# Altium PCB eth_witch.PcbDoc (part 2 of 2)
Units mm, origin at the board's own origin, x right, y up, seen from the top; angles counter-clockwise.
Board outline 80 x 66.5 mm, 4 copper layers (Top Layer, Layer 2, Layer 1, Bottom Layer), stack 1.01 mm thick; 112 components, 94 nets, 442 pads, 468 vias.
Unrouted connection lines stored in the file: 2.
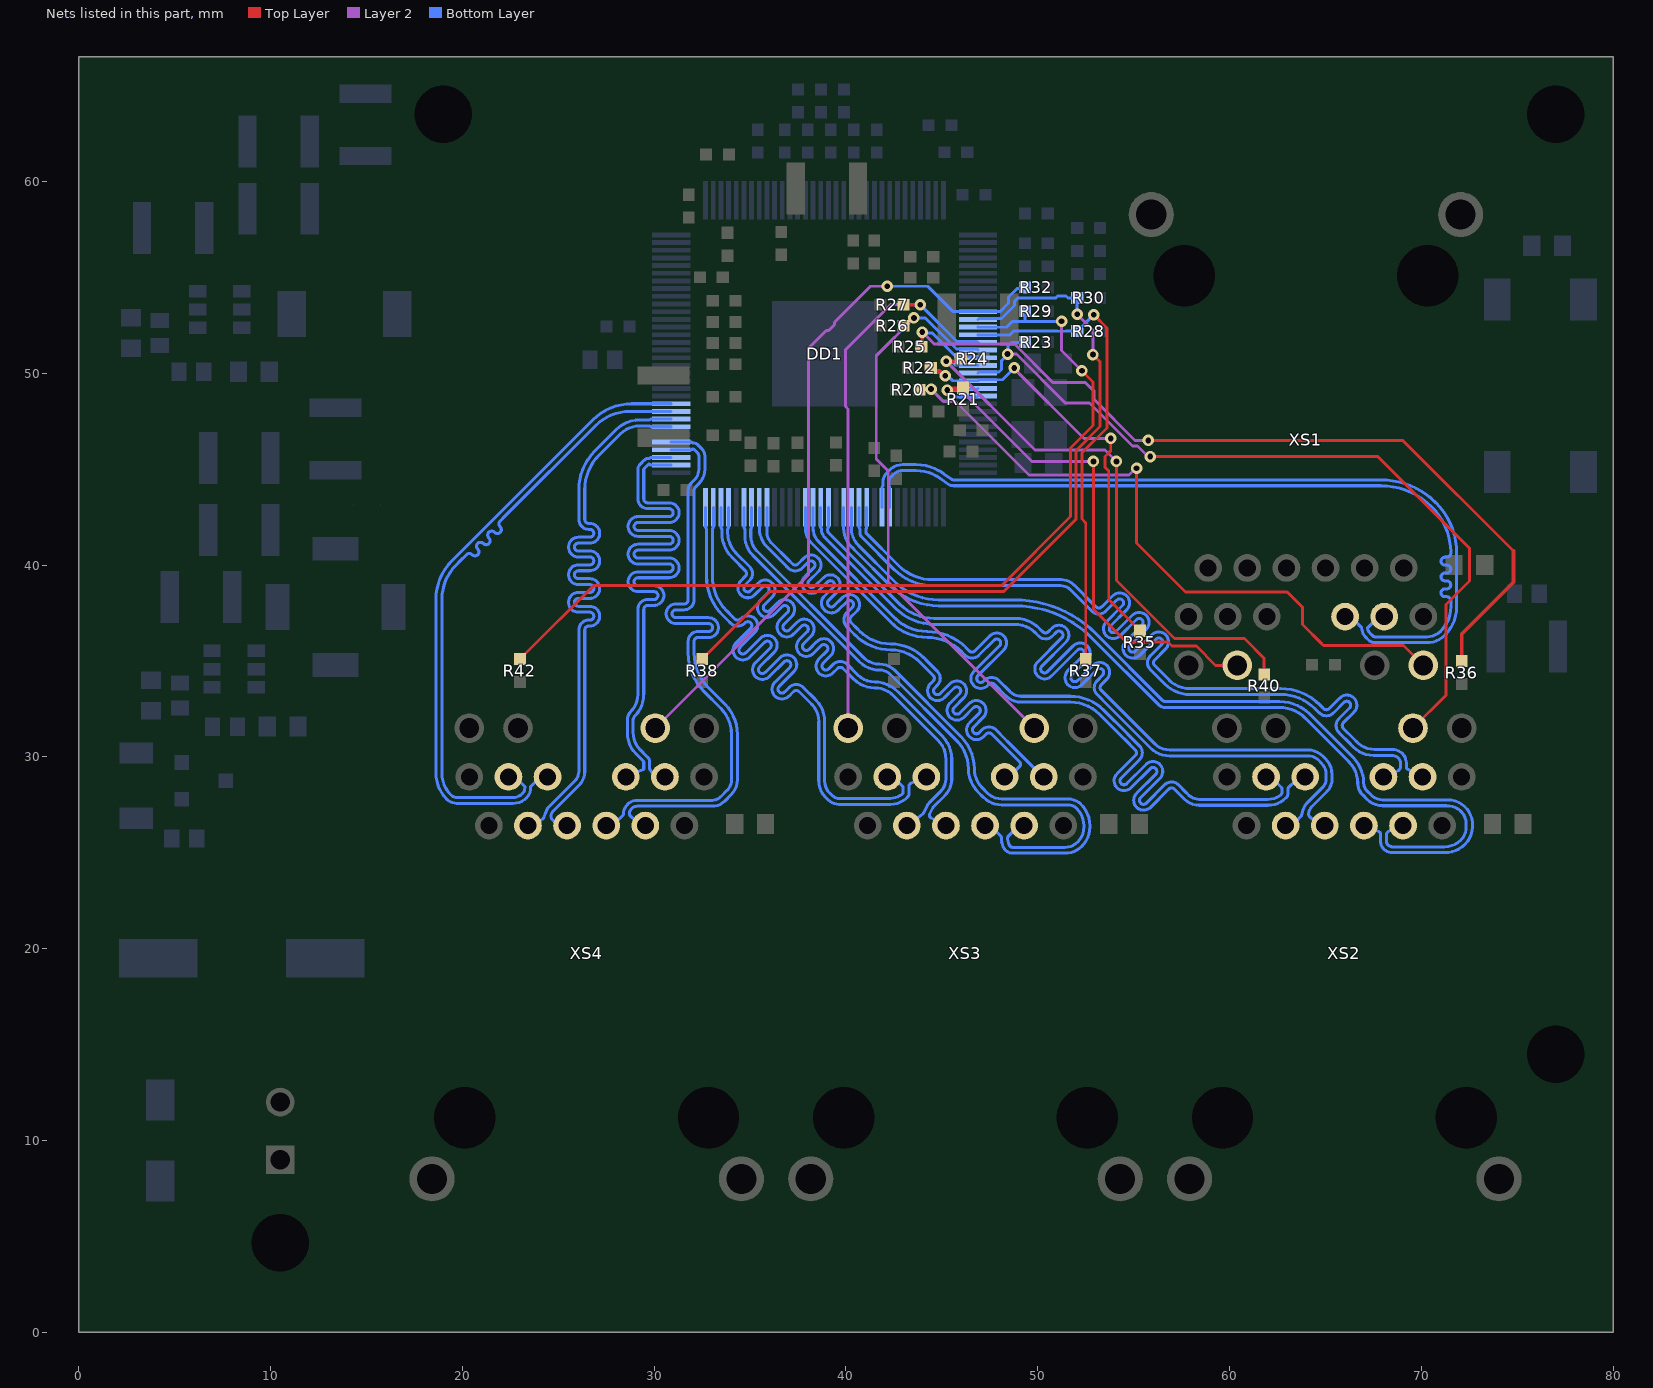
[diagram p4: the nets of this part, all layers, seen from the top]

## Via types
v1: diameter 0.6, hole 0.3, Top Layer to Bottom Layer, tented both sides, 450 vias
v2: diameter 0.8, hole 0.4, Top Layer to Bottom Layer, tented both sides, 18 vias

## Nets (pads, with @x,y where several pads share a name; then routed paths per layer and width w, separated by ;. In a path a pad name is that pad's centre, name@x,y a point inside that pad or via, vN(x,y) a via of type N, cw(c..) or ccw(c..) an arc to the next point about the centre after c; other vN are vias at no path point) (continued)
P0D_N: DD1.105 XS1.9 | length 44.5
  Bottom Layer w0.158: DD1.105@41.88,43.01 41.88,44.024 cw(c42.037,44.024) 41.926,44.135 41.926,44.309 cw(c42.656,44.309) 42.139,44.825 42.257,44.943 cw(c42.958,44.242) 42.958,45.233 43.651,45.233 43.652,45.233 cw(c43.642,42.74) 45.086,44.772 45.088,44.77 45.509,44.472 ccw(c45.6,44.601) 45.6,44.443 45.699,44.443 67.88,44.443 67.882,44.443 cw(c67.882,40.392) 70.747,43.256 ; XS1.9@66.02,37.31 cw(c66.02,36.607) 66.517,37.104 66.886,36.735 ccw(c67.59,36.735) 67.092,36.237 67.237,36.092 ccw(c67.576,36.431) 67.576,35.952 70.281,35.952 ccw(c70.281,37.284) 71.223,36.342 ccw(c69.738,37.827) 71.838,37.827 71.838,40.621 71.838,40.625 ccw(c68.113,40.622) 70.748,43.256
P0D_P: DD1.104 XS1.8 | length 44.5
  Bottom Layer w0.158: DD1.104@42.28,43.01 42.28,44.024 ccw(c42.123,44.024) 42.234,44.135 42.234,44.309 cw(c42.656,44.309) 42.357,44.607 42.475,44.725 cw(c42.958,44.242) 42.958,44.925 43.655,44.925 43.657,44.925 cw(c43.636,42.725) 44.908,44.52 44.91,44.519 45.33,44.221 ccw(c45.6,44.601) 45.6,44.135 45.699,44.135 67.88,44.135 67.882,44.135 cw(c67.882,40.392) 70.528,43.04 cw(c68.113,40.622) 71.496,41.106 cw(c68.113,40.622) 71.506,41.027 71.53,40.625 71.53,40.615 cw(c71.324,40.615) 71.324,40.409 71.228,40.409 ccw(c71.228,40.203) 71.022,40.203 ccw(c71.228,40.203) 71.228,39.997 71.324,39.997 cw(c71.324,39.791) 71.53,39.791 cw(c71.324,39.791) 71.324,39.585 71.229,39.585 ccw(c71.229,39.379) 71.023,39.379 ccw(c71.229,39.379) 71.229,39.173 71.324,39.173 cw(c71.324,38.967) 71.53,38.967 cw(c71.324,38.967) 71.324,38.761 71.229,38.761 ccw(c71.229,38.555) 71.023,38.555 ccw(c71.229,38.555) 71.229,38.349 71.324,38.349 cw(c71.324,38.143) 71.53,38.143 71.53,37.906 71.53,37.827 cw(c69.738,37.827) 71.005,36.56 cw(c70.281,37.284) 70.281,36.26 67.576,36.26 cw(c67.576,36.431) 67.455,36.31 67.31,36.455 cw(c67.59,36.735) 67.194,36.735 67.563,37.104 cw(c68.06,36.607) XS1.8@68.06,37.31
P0LED0: DD1.86 R20.1 XS1.13 | length 38.3
  Top Layer w0.15: v1(55.15,45.05) 55.15,41.15 57.7,38.6 63,38.6 63.8,37.8 63.8,36.9 64.8,35.9 64.8,35.888 64.888,35.8 69.07,35.8 XS1.13@70.1,34.77
  Top Layer w0.25: R20.1@43.825,49.146 43.938,49.259 43.938,49.241 44.017,49.161 44.419,49.161 v1(44.434,49.176)
  Layer 2 w0.15: v1(44.434,49.176) 45.075,48.535 45.702,48.535 49.541,44.697 54.761,44.697 55.114,45.05 v1(55.15,45.05)
  Bottom Layer w0.15: v1(44.434,49.176) 45.062,48.548 45.45,48.548 45.662,48.76 46.83,48.76 DD1.86@46.88,48.81
P0LED1: DD1.85 R21.1 XS1.15 | length 28.1
  Top Layer w0.15: v1(52.9,45.4) 52.9,37.7 54.614,35.986 56.789,35.986 57,35.775 58.266,35.775 59.271,34.77 XS1.15@60.4,34.77
  Top Layer w0.25: v1(45.284,49.124) 45.346,49.186 46.039,49.186 R21.1@46.1,49.247
  Layer 2 w0.15: v1(45.284,49.124) 45.309,49.1 46,49.1 49.7,45.4 v1(52.9,45.4)
  Bottom Layer w0.15: v1(45.284,49.124) 45.327,49.167 46.837,49.167 DD1.85@46.88,49.21
P0LED2: DD1.84 R22.1 R35.1 | length 22.4
  Top Layer w0.15: v1(53.8,46.6) 53.8,45.958 53.5,45.658 53.5,45.1 53.7,44.9 53.7,38.209 55.325,36.584 R35.1@55.325,36.572
  Top Layer w0.25: R22.1@44.422,50.275 44.434,50.275 44.614,50.095 44.86,50.095 45.08,49.875 v1(45.175,49.875)
  Layer 2 w0.15: v1(48.775,50.275) 48.775,50.233 52.408,46.6 v1(53.8,46.6)
  Bottom Layer w0.15: v1(45.175,49.875) 45.297,49.875 45.562,49.61 DD1.84@46.88,49.61 46.93,49.66 48.16,49.66 v1(48.775,50.275)
P1A_N: DD1.108 XS2.10 | length 46.7
  Bottom Layer w0.158: DD1.108@40.68,43.01 40.68,41.996 ccw(c40.837,41.996) 40.726,41.885 40.726,41.685 ccw(c41.034,41.685) 40.816,41.467 42.522,39.761 ccw(c44.536,41.775) 44.536,38.927 51.194,38.927 cw(c51.194,38.211) 51.699,38.719 52.653,37.765 52.773,37.645 52.817,37.601 ccw(c53.182,37.964) 53.545,37.6 54.122,38.177 ; 54.123,38.178 cw(c54.268,38.032) 54.414,38.178 cw(c54.268,38.032) 54.414,37.886 53.525,36.998 53.525,36.991 ccw(c53.934,36.679) 53.57,36.316 ccw(c53.934,36.679) 54.297,36.316 55.14,37.159 ; 55.141,37.159 cw(c55.287,37.014) 55.432,37.159 cw(c55.287,37.014) 55.432,36.868 54.543,35.979 54.543,35.973 ccw(c54.952,35.661) 54.589,35.298 ccw(c54.952,35.661) 55.316,35.298 56.158,36.141 ; 56.159,36.141 cw(c56.305,35.996) 56.45,36.141 cw(c56.305,35.996) 56.45,35.85 55.873,35.272 ccw(c56.236,34.909) 55.874,34.545 56.237,34.181 56.357,34.062 56.631,33.787 56.633,33.785 ccw(c56.963,34.114) 56.636,33.782 ccw(c57.926,35.086) 57.928,33.252 62.661,33.252 cw(c62.661,30.712) 64.457,32.508 64.505,32.46 64.626,32.339 64.672,32.293 ccw(c65.044,32.663) 65.414,32.292 65.964,32.841 cw(c66.109,32.695) 66.255,32.55 65.706,32.001 ccw(c66.076,31.63) 65.707,31.258 66.282,30.683 66.375,30.59 66.396,30.569 66.404,30.561 66.417,30.548 cw(c66.305,30.437) 66.419,30.546 66.436,30.528 ccw(c67.491,31.537) 67.495,30.077 68.462,30.077 cw(c68.462,29.592) 68.805,29.935 cw(c68.564,29.694) 68.905,29.694 68.905,29.463 cw(c68.747,29.463) 68.859,29.351 68.785,29.277 XS2.10@68.02,28.96
P1A_P: DD1.107 XS2.11 | length 46.7
  Bottom Layer w0.158: DD1.107@41.08,43.01 41.08,41.996 cw(c40.923,41.996) 41.034,41.885 41.034,41.685 42.74,39.979 ccw(c44.536,41.775) 44.536,39.235 51.225,39.235 51.227,39.235 cw(c51.226,38.287) 51.896,38.957 51.898,38.956 52.871,37.983 52.991,37.863 53.036,37.818 ccw(c53.182,37.964) 53.327,37.818 53.95,38.441 53.956,38.441 cw(c54.268,38.032) 54.632,38.395 cw(c54.268,38.032) 54.632,37.669 53.789,36.826 ; 53.788,36.825 ccw(c53.934,36.679) 53.788,36.534 ccw(c53.934,36.679) 54.079,36.534 54.968,37.422 54.975,37.422 cw(c55.287,37.014) 55.65,37.377 cw(c55.287,37.014) 55.65,36.65 54.807,35.807 ccw(c54.952,35.661) 54.806,35.515 ccw(c54.952,35.661) 55.098,35.515 55.986,36.404 55.993,36.404 cw(c56.305,35.996) 56.668,36.359 cw(c56.305,35.996) 56.668,35.632 56.091,35.054 ccw(c56.236,34.909) 56.091,34.763 56.455,34.399 56.574,34.279 56.849,34.005 56.851,34.003 ccw(c56.963,34.114) 56.852,34.002 ccw(c57.926,35.086) 57.928,33.56 62.661,33.56 cw(c62.661,30.677) 64.699,32.716 64.73,32.686 64.851,32.564 64.898,32.517 ccw(c65.044,32.663) 65.189,32.517 65.738,33.065 ; 65.738,33.066 cw(c66.109,32.695) 66.426,33.113 66.433,33.113 66.479,33.066 ; 66.48,33.066 66.526,33.019 66.526,33.013 cw(c66.109,32.695) 66.48,32.325 65.931,31.776 ccw(c66.076,31.63) 65.931,31.484 66.507,30.908 66.629,30.786 66.693,30.722 ccw(c67.55,31.644) 66.702,30.714 ccw(c67.55,31.644) 67.553,30.385 68.462,30.385 cw(c68.462,29.592) 69.023,30.153 cw(c68.564,29.694) 69.213,29.694 69.213,29.48 ccw(c69.371,29.48) 69.259,29.369 XS2.11@70.06,28.96
P1B_N: DD1.110 XS2.5 | length 46.7
  Bottom Layer w0.158: DD1.110@39.88,43.01 39.88,41.931 ccw(c41.284,41.931) 40.291,40.939 40.302,40.932 cw(c40.226,40.794) 40.343,40.9 ; 40.344,40.899 40.425,40.806 ccw(c40.776,41.112) 40.446,40.784 42.307,38.922 ccw(c44.832,41.449) 44.832,37.877 48.786,37.877 cw(c48.786,32.198) 52.8,36.215 56.302,32.713 ccw(c56.631,33.043) 56.631,32.577 62.605,32.577 cw(c62.605,30.687) 63.942,32.023 66.22,29.745 cw(c65.111,28.635) 66.68,28.635 ccw(c67.55,28.635) 66.935,28.02 67.162,27.792 ccw(c67.984,28.614) 67.984,27.452 71.316,27.452 cw(c71.318,26.333) 71.906,27.285 cw(c71.318,26.333) 71.908,27.283 cw(c71.437,26.525) 72.33,26.526 72.33,26.524 72.33,26.324 cw(c71.391,26.324) 72.055,25.66 cw(c71.21,26.505) 71.21,25.31 68.496,25.31 cw(c68.496,25.651) 68.255,25.41 cw(c68.436,25.591) 68.18,25.591 68.18,25.958 cw(c68.338,25.958) 68.278,26.104 XS2.5@69.04,26.42
P1B_P: DD1.109 XS2.4 | length 47.6
  Bottom Layer w0.158: DD1.109@40.28,43.01 40.28,41.931 ccw(c41.598,41.931) 40.548,41.134 40.575,41.102 ; 40.576,41.101 40.657,41.008 ccw(c40.776,41.112) 40.664,41.001 42.525,39.14 ccw(c44.832,41.449) 44.832,38.185 48.786,38.185 cw(c48.786,32.199) 53.018,36.433 56.519,32.931 ccw(c56.631,33.043) 56.631,32.885 62.605,32.885 cw(c62.605,30.687) 64.159,32.241 66.438,29.962 cw(c65.111,28.635) 66.988,28.635 ccw(c67.55,28.635) 67.153,28.237 67.38,28.01 ccw(c67.984,28.614) 67.984,27.76 71.374,27.76 cw(c71.374,26.476) 72.655,26.382 72.652,26.334 ccw(c72.809,26.322) 72.652,26.327 cw(c71.358,26.357) 72.651,26.326 cw(c71.358,26.357) 72.273,25.442 cw(c71.21,26.505) 71.21,25.002 68.496,25.002 cw(c68.496,25.651) 68.037,25.192 cw(c68.436,25.591) 67.872,25.591 67.872,25.953 ccw(c67.714,25.953) 67.774,26.099 XS2.4@67,26.42
P1C_N: DD1.113 XS2.2 | length 45.5
  Bottom Layer w0.158: DD1.113@38.68,43.01 38.68,41.996 ccw(c38.837,41.996) 38.726,41.885 38.726,41.86 ccw(c39.345,41.86) 38.907,41.422 42.584,37.746 ccw(c44.597,39.76) 44.597,36.912 48.781,36.912 48.808,36.912 cw(c48.812,35.424) 49.868,36.472 49.87,36.47 49.872,36.468 49.913,36.427 49.932,36.408 50.036,36.304 ccw(c50.401,36.666) 50.764,36.303 50.959,36.498 cw(c51.104,36.352) 51.251,36.207 49.99,34.947 ccw(c50.354,34.583) 49.99,34.22 ; 49.991,34.219 ccw(c50.354,34.583) 50.717,34.22 ; 50.718,34.221 52.067,35.57 cw(c52.213,35.424) 52.359,35.57 cw(c52.213,35.424) 52.359,35.279 51.567,34.487 ccw(c51.931,34.124) 51.567,33.761 ; 51.568,33.759 ccw(c51.931,34.124) 52.294,33.76 ; 52.295,33.761 53.086,34.552 cw(c53.231,34.406) 53.377,34.261 53.092,33.975 ccw(c53.455,33.612) 53.093,33.247 ; 53.093,33.247 53.66,32.68 55.88,30.46 ccw(c56.865,31.445) 56.865,30.052 64.071,30.052 cw(c64.071,29.226) 64.655,29.81 64.783,29.682 cw(c64.185,29.085) 65.03,29.085 65.03,28.832 cw(c64.433,28.832) 64.855,28.41 64.021,27.576 ccw(c64.133,27.464) 64.013,27.567 63.997,27.549 ccw(c64.623,27.01) 63.828,27.232 63.751,26.96 cw(c63.599,27.003) 63.71,26.89 63.467,26.647 cw(c62.92,27.193) XS2.2@62.92,26.42
P1C_P: DD1.112 XS2.3 | length 45.5
  Bottom Layer w0.158: DD1.112@39.08,43.01 39.08,41.996 cw(c38.923,41.996) 39.034,41.885 39.034,41.86 ccw(c39.345,41.86) 39.125,41.64 42.801,37.964 ccw(c44.597,39.76) 44.597,37.22 48.781,37.22 48.847,37.22 cw(c48.847,35.507) 50.058,36.718 50.06,36.716 50.09,36.685 50.255,36.521 ccw(c50.401,36.666) 50.546,36.521 50.741,36.716 cw(c51.104,36.352) 51.416,36.761 51.423,36.761 51.468,36.716 ; 51.467,35.988 50.208,34.729 ccw(c50.354,34.583) 50.499,34.437 51.85,35.788 cw(c52.213,35.424) 52.576,35.788 cw(c52.213,35.424) 52.576,35.061 ; 51.468,35.989 ccw(c51.104,36.352) 51.513,36.664 51.513,36.67 51.468,36.715 ; 52.576,35.06 51.785,34.269 ccw(c51.931,34.124) 52.076,33.977 52.868,34.769 cw(c53.231,34.406) 53.543,34.815 53.55,34.815 53.594,34.77 ; 53.594,34.042 53.31,33.757 ccw(c53.455,33.612) 53.31,33.466 53.877,32.898 56.098,30.678 ccw(c56.865,31.445) 56.865,30.36 64.071,30.36 cw(c64.071,29.226) 64.873,30.028 65,29.9 cw(c64.185,29.085) 65.338,29.085 65.338,28.832 cw(c64.433,28.832) 65.073,28.192 64.292,27.411 ccw(c64.743,26.96) 64.11,27.041 ccw(c64.267,27.021) 64.155,26.91 64.423,26.642 ccw(c64.96,27.18) XS2.3@64.96,26.42 ; 53.595,34.043 ccw(c53.231,34.406) 53.64,34.718 53.64,34.724 53.595,34.769
P1D_N: DD1.115 XS2.9 | length 45.2
  Bottom Layer w0.158: DD1.115@37.88,43.01 37.88,41.931 ccw(c38.982,41.931) 38.203,41.152 42.342,37.013 42.344,37.011 ccw(c44.236,38.903) 44.238,36.227 cw(c44.236,33.687) 46.032,35.483 46.043,35.472 46.207,35.308 ccw(c46.571,35.67) 46.935,35.307 47.714,36.086 cw(c47.86,35.941) 48.006,35.795 46.659,34.448 ccw(c47.022,34.084) 46.658,33.722 ; 46.659,33.72 ccw(c47.022,34.084) 47.385,33.721 ; 47.386,33.722 47.444,33.78 cw(c47.59,33.634) 47.735,33.78 48.313,33.202 48.33,33.185 ccw(c49.134,33.989) 49.134,32.852 51.69,32.852 51.692,32.852 cw(c51.695,30.695) 53.22,32.22 54.407,31.033 54.527,30.913 55.08,30.36 ; 55.081,30.359 cw(c54.936,30.213) 55.081,30.067 54.129,29.115 ccw(c54.492,28.752) 54.804,28.343 54.811,28.343 55.855,29.387 cw(c56.001,29.242) 56.146,29.387 cw(c56.001,29.242) 56.146,29.096 ; 56.146,29.095 55.147,28.097 ccw(c55.511,27.733) 55.147,27.37 ccw(c55.511,27.733) 55.823,27.325 55.829,27.325 56.826,28.322 cw(c56.972,28.177) 57.118,28.322 57.522,27.918 57.642,27.798 57.65,27.79 ccw(c58.405,28.544) 58.405,27.477 62.006,27.477 ccw(c62.006,28.809) 62.948,27.867 ccw(c62.73,28.085) 63.038,28.085 63.038,28.303 cw(c63.196,28.303) 63.084,28.414 63.411,28.741 cw(c63.94,28.212) XS2.9@63.94,28.96
P1D_P: DD1.114 XS2.8 | length 44.1
  Bottom Layer w0.158: DD1.114@38.28,43.01 38.28,41.931 ccw(c39.296,41.931) 38.578,41.212 42.56,37.23 42.564,37.226 ccw(c44.236,38.903) 44.236,36.535 ; 44.238,36.535 cw(c44.236,33.687) 46.25,35.701 46.261,35.69 46.426,35.525 ccw(c46.571,35.67) 46.717,35.525 47.496,36.304 cw(c47.86,35.941) 48.172,36.349 48.178,36.349 48.223,36.304 48.268,36.259 48.268,36.252 cw(c47.86,35.941) 48.223,35.577 ; 48.223,35.576 46.876,34.23 ccw(c47.022,34.084) 47.167,33.938 47.226,33.997 cw(c47.59,33.634) 47.953,33.997 48.531,33.42 48.548,33.403 ccw(c49.134,33.989) 49.134,33.16 51.689,33.16 51.691,33.16 cw(c51.696,30.697) 53.438,32.437 53.441,32.435 54.625,31.25 54.745,31.131 55.344,30.531 55.344,30.525 cw(c54.936,30.213) 55.299,29.85 54.347,28.897 ccw(c54.492,28.752) 54.346,28.606 54.347,28.606 ccw(c54.492,28.752) 54.638,28.606 ; 54.639,28.607 55.637,29.605 cw(c56.001,29.242) 56.364,29.605 cw(c56.001,29.242) 56.409,28.93 56.409,28.923 55.365,27.879 ccw(c55.511,27.733) 55.365,27.588 ccw(c55.511,27.733) 55.656,27.588 ; 55.657,27.588 56.609,28.54 cw(c56.972,28.177) 57.284,28.585 57.29,28.585 57.74,28.135 57.778,28.098 57.86,28.016 57.868,28.007 ccw(c58.405,28.544) 58.405,27.785 62.006,27.785 ccw(c62.006,28.809) 62.321,27.835 ccw(c62.006,28.809) 62.676,28.035 ccw(c62.572,28.154) 62.73,28.153 62.73,28.32 ccw(c62.572,28.32) 62.684,28.431 62.335,28.78 ccw(c61.9,28.344) XS2.8@61.9,28.96
P1LED0: DD1.82 R24.2 R40.1 | length 30
  Top Layer w0.15: v1(54.1,45.4) 54.1,39.2 57.129,36.171 60.774,36.171 61.8,35.145 R40.1@61.8,34.297
  Top Layer w0.2: v1(45.225,50.625) 45.853,50.625 R24.2@45.978,50.75
  Layer 2 w0.15: v1(45.225,50.625) 49.85,46 53.5,46 v1(54.1,45.4)
  Bottom Layer w0.15: v1(45.225,50.625) 45.302,50.548 45.584,50.548 45.698,50.435 45.98,50.435 DD1.82@46.88,50.41
P1LED1: DD1.83 R23.1 XS2.15 | length 42.5
  Top Layer w0.15: v1(55.858,45.654) 67.721,45.654 72.5,40.875 72.5,39.175 71.275,37.95 71.275,33.215 XS2.15@69.56,31.5
  Layer 2 w0.15: v1(48.425,51) 48.883,51 51.433,48.45 52.692,48.45 54.943,46.199 55.192,46.199 55.737,45.654 v1(55.858,45.654)
  Bottom Layer w0.15: DD1.83@46.88,50.01 46.93,50.06 47.973,50.06 48.105,50.192 48.105,50.654 48.425,50.974 v1(48.425,51) 48.446,51.021 48.446,51.421 48.625,51.6 R23.1@49.328,51.6
P1LED2: DD1.81 R25.1 R36.1 | length 46.9
  Top Layer w0.15: v1(55.756,46.499) 69.026,46.499 74.8,40.725
  Top Layer w0.2: R25.1@43.922,51.375 43.975,51.428 v1(43.975,52.15) ; R36.1@72.101,34.993 72.101,36.401 74.8,39.1 74.8,40.725
  Layer 2 w0.15: v1(43.975,52.15) 44.6,51.525 48.783,51.525 50.783,49.525 52.475,49.525 52.942,49.058 52.942,48.625 55.067,46.499 v1(55.756,46.499)
  Bottom Layer w0.15: v1(43.975,52.15) 44.033,52.092 44.5,52.092 45.732,50.86 46.83,50.86 DD1.81@46.88,50.81
P2A_N: DD1.121 XS3.10 | length 32.6
  Bottom Layer w0.158: DD1.121@35.48,43.01 35.48,41.931 ccw(c36.884,41.931) 35.891,40.938 36.818,40.012 36.939,39.89 36.987,39.843 ccw(c37.351,40.205) 37.71,39.837 38.036,40.154 cw(c38.179,40.006) 38.326,40.15 ; 37.85,38.683 ccw(c38.219,39.04) 38.577,38.672 39.044,39.126 cw(c39.188,38.978) 39.336,39.121 cw(c39.188,38.978) 39.332,38.831 38.879,38.391 ccw(c39.237,38.022) 38.825,37.715 38.825,37.707 38.87,37.663 ccw(c39.237,38.022) 38.878,37.655 38.916,37.617 38.921,37.617 ccw(c39.237,38.022) 39.596,37.654 40.048,38.093 cw(c40.191,37.945) 40.339,38.089 ; 37.85,38.683 cw(c38.219,39.04) 37.861,39.409 38.323,39.859 ccw(c38.179,40.006) 38.327,40.149 ; 40.34,38.089 cw(c40.191,37.945) 40.336,37.798 40.048,37.519 ccw(c40.406,37.15) 40.044,36.786 40.368,36.462 40.486,36.344 40.49,36.339 ccw(c42.33,38.179) 42.33,35.577 cw(c42.33,33.445) 43.837,34.953 43.871,34.919 43.882,34.908 43.991,34.799 44.545,34.245 cw(c44.399,34.099) 44.545,33.954 44.402,33.811 ccw(c44.766,33.448) 44.401,33.085 ; 44.403,33.083 ccw(c44.766,33.448) 45.129,33.084 45.631,33.586 cw(c45.777,33.44) 45.923,33.295 45.421,32.793 ; 45.42,32.793 ccw(c45.784,32.429) 45.42,32.066 ccw(c45.784,32.429) 46.147,32.066 46.65,32.568 cw(c46.795,32.422) 46.941,32.568 cw(c46.795,32.422) 46.941,32.277 46.439,31.775 ccw(c46.802,31.411) 46.439,31.048 ccw(c46.802,31.411) 47.165,31.048 47.308,31.19 cw(c47.454,31.045) 47.6,31.19 48.102,30.688 48.222,30.568 49.056,29.734 cw(c48.944,29.623) 49.056,29.511 48.551,29.006 cw(c48.44,29.118) 48.44,28.96 XS3.10@48.27,28.96
P2A_P: DD1.120 XS3.11 | length 32.6
  Bottom Layer w0.158: DD1.120@35.88,43.01 35.88,41.712 35.88,41.71 ccw(c36.665,41.71) 36.112,41.153 37.039,40.226 37.157,40.108 37.206,40.059 ccw(c37.351,40.205) 37.495,40.057 37.821,40.374 cw(c38.179,40.006) 38.548,40.364 cw(c38.179,40.006) 38.537,39.637 ; 38.537,39.637 38.076,39.188 ccw(c38.219,39.04) 38.071,38.897 ccw(c38.219,39.04) 38.362,38.892 38.829,39.346 cw(c39.188,38.978) 39.555,39.337 39.6,39.293 39.6,39.285 cw(c39.188,38.978) 39.546,38.609 ; 39.545,38.609 39.094,38.17 ccw(c39.237,38.022) 39.089,37.879 ccw(c39.237,38.022) 39.38,37.874 39.833,38.314 cw(c40.191,37.945) 40.56,38.304 cw(c40.191,37.945) 40.55,37.577 ; 40.549,37.576 40.263,37.298 ccw(c40.406,37.15) 40.261,37.004 40.586,36.679 40.707,36.558 40.708,36.557 ccw(c42.33,38.179) 42.33,35.885 cw(c42.33,33.445) 44.055,35.17 44.089,35.137 44.208,35.017 44.763,34.463 cw(c44.399,34.099) 44.763,33.736 44.62,33.593 ccw(c44.766,33.448) 44.62,33.302 ; 44.62,33.302 ccw(c44.766,33.448) 44.911,33.301 45.413,33.804 cw(c45.777,33.44) 46.089,33.849 46.095,33.849 46.185,33.759 46.185,33.752 cw(c45.777,33.44) 46.14,33.077 ; 46.139,33.076 45.638,32.575 ccw(c45.784,32.429) 45.638,32.284 ccw(c45.784,32.429) 45.929,32.284 46.431,32.785 ; 46.431,32.786 cw(c46.795,32.422) 47.158,32.786 cw(c46.795,32.422) 47.158,32.059 46.656,31.556 ccw(c46.802,31.411) 46.656,31.265 ccw(c46.802,31.411) 46.948,31.265 47.09,31.408 cw(c47.454,31.045) 47.817,31.408 48.32,30.906 48.439,30.786 50.234,28.991 ccw(c50.31,29.067) XS3.11@50.31,28.96
P2B_N: DD1.123 XS3.5 | length 32.7
  Bottom Layer w0.158: DD1.123@34.68,43.01 34.68,41.996 ccw(c34.837,41.996) 34.726,41.885 34.726,41.51 ccw(c36.13,41.51) 35.137,40.517 40.684,34.971 ccw(c41.755,36.042) 41.755,34.527 cw(c41.755,33.723) 42.323,34.292 45.779,30.836 cw(c44.328,29.385) 46.38,29.385 ccw(c48.095,29.385) 46.882,28.172 47.162,27.892 ccw(c48.104,28.834) 48.104,27.502 51.566,27.502 cw(c51.566,26.846) 52.03,27.31 52.034,27.306 cw(c51.138,26.41) 52.405,26.41 52.405,26.345 cw(c51.295,26.345) 52.08,25.56 cw(c51.416,26.224) 51.416,25.285 48.929,25.285 48.678,25.285 cw(c48.679,25.443) 48.553,25.347 cw(c49.035,25.713) 48.43,25.712 48.43,25.76 cw(c48.611,25.76) 48.483,25.888 48.821,26.226 cw(c49.29,25.756) XS3.5@49.29,26.42
P2B_P: DD1.122 XS3.4 | length 33.7
  Bottom Layer w0.158: DD1.122@35.08,43.01 35.08,41.996 cw(c34.923,41.996) 35.034,41.885 35.034,41.51 ccw(c36.13,41.51) 35.355,40.735 40.901,35.189 ccw(c41.755,36.042) 41.755,34.835 cw(c41.755,33.723) 42.541,34.509 45.997,31.054 cw(c44.328,29.385) 46.688,29.385 ccw(c48.095,29.385) 47.1,28.39 47.38,28.11 ccw(c48.104,28.834) 48.104,27.81 51.566,27.81 cw(c51.566,26.846) 52.248,27.528 52.252,27.524 cw(c51.138,26.41) 52.713,26.41 52.713,26.345 cw(c51.295,26.345) 52.298,25.342 cw(c51.416,26.224) 51.416,24.977 48.676,24.977 cw(c48.676,25.456) 48.339,25.116 ccw(c48.227,25.004) 48.337,25.117 cw(c48.89,25.67) 48.109,25.648 48.105,25.773 ccw(c47.947,25.77) 48.059,25.881 47.711,26.229 ccw(c47.25,25.768) XS3.4@47.25,26.42
P2C_N: DD1.126 XS3.2 | length 32.1
  Bottom Layer w0.158: DD1.126@33.48,43.01 33.48,41.996 ccw(c33.637,41.996) 33.526,41.885 33.526,41.685 ccw(c35.353,41.685) 34.061,40.393 34.079,40.376 34.753,39.702 cw(c34.607,39.556) 34.753,39.411 34.514,39.172 ccw(c34.877,38.808) 34.513,38.445 ; 34.515,38.444 ccw(c34.877,38.808) 35.241,38.445 35.644,38.848 cw(c35.79,38.702) 35.935,38.848 cw(c35.79,38.702) 35.936,38.557 35.532,38.153 ccw(c35.895,37.79) 35.531,37.427 ; 35.533,37.426 ccw(c35.895,37.79) 36.259,37.426 ; 36.259,37.427 36.662,37.83 cw(c36.808,37.684) 36.954,37.539 36.55,37.135 ccw(c36.914,36.772) 36.55,36.408 ccw(c36.914,36.772) 37.277,36.408 ; 37.278,36.409 37.68,36.812 cw(c37.826,36.666) 37.972,36.521 37.568,36.117 ccw(c37.932,35.753) 37.568,35.39 ; 37.569,35.389 ccw(c37.932,35.753) 38.295,35.39 38.699,35.793 cw(c38.844,35.648) 38.99,35.793 cw(c38.844,35.648) 38.99,35.502 38.587,35.099 ccw(c38.95,34.735) 38.586,34.372 ; 38.587,34.371 ccw(c38.95,34.735) 39.313,34.372 39.552,34.611 cw(c39.698,34.465) 39.844,34.611 40.385,34.069 40.409,34.046 ccw(c41.48,35.117) 41.48,33.602 cw(c41.48,32.195) 42.475,33.19 44.798,30.867 cw(c43.817,29.885) 45.205,29.885 45.205,28.849 cw(c44.292,28.849) 44.938,28.204 44.336,27.601 ccw(c44.666,27.273) 44.252,27.487 44.048,27.09 cw(c43.908,27.162) 44.008,27.04 43.887,26.94 XS3.2@43.17,26.42
P2C_P: DD1.125 XS3.3 | length 32.1
  Bottom Layer w0.158: DD1.125@33.88,43.01 33.88,41.996 cw(c33.723,41.996) 33.834,41.885 33.834,41.685 ccw(c35.353,41.685) 34.279,40.611 34.296,40.594 34.97,39.92 cw(c34.607,39.556) 34.97,39.193 34.731,38.954 ccw(c34.877,38.808) 35.022,38.662 35.426,39.066 cw(c35.79,38.702) 36.153,39.066 cw(c35.79,38.702) 36.153,38.339 ; 36.152,38.338 35.75,37.936 ccw(c35.895,37.79) 36.041,37.644 36.444,38.048 cw(c36.808,37.684) 37.12,38.093 37.126,38.093 37.171,38.048 37.216,38.002 37.216,37.996 cw(c36.808,37.684) 37.171,37.321 ; 37.171,37.32 36.768,36.917 ccw(c36.914,36.772) 36.768,36.626 ccw(c36.914,36.772) 37.059,36.626 37.463,37.029 cw(c37.826,36.666) 38.138,37.074 38.144,37.074 38.189,37.03 ; 38.189,36.302 37.786,35.899 ccw(c37.932,35.753) 38.077,35.607 38.481,36.011 cw(c38.844,35.648) 39.208,36.011 cw(c38.844,35.648) 39.208,35.284 38.804,34.881 ccw(c38.95,34.735) 39.095,34.589 39.335,34.828 cw(c39.698,34.465) 40.062,34.828 40.603,34.287 40.626,34.264 ; 38.189,36.302 ccw(c37.826,36.666) 38.235,36.978 38.235,36.984 38.19,37.029 ; 40.627,34.263 ccw(c41.48,35.117) 41.48,33.91 cw(c41.48,32.195) 42.693,33.408 45.016,31.084 cw(c43.817,29.885) 45.513,29.885 45.513,28.849 cw(c44.292,28.849) 45.156,27.986 44.554,27.384 ccw(c44.666,27.273) 44.526,27.345 44.364,27.03 ccw(c44.504,26.958) 44.347,26.965 ccw(c44.504,26.958) 44.424,26.822 45.187,26.432 XS3.3@45.21,26.42
P2D_N: DD1.128 XS3.9 | length 32.3
  Bottom Layer w0.158: DD1.128@32.68,43.01 32.68,41.996 ccw(c32.837,41.996) 32.726,41.885 32.726,39.408 ccw(c35.574,39.408) 33.56,37.394 33.823,37.132 33.987,36.968 ccw(c34.351,37.33) 34.714,36.967 34.737,36.989 cw(c34.882,36.844) 35.029,36.699 34.259,35.929 ccw(c34.623,35.566) 34.259,35.203 ; 34.26,35.202 ccw(c34.623,35.566) 34.986,35.202 ; 34.987,35.203 35.755,35.971 cw(c35.901,35.826) 36.046,35.971 cw(c35.901,35.826) 36.047,35.68 35.278,34.911 ccw(c35.641,34.548) 35.277,34.185 ; 35.279,34.183 ccw(c35.641,34.548) 36.005,34.184 ; 36.005,34.185 36.773,34.953 cw(c36.919,34.807) 37.065,34.662 36.296,33.893 ccw(c36.659,33.529) 36.296,33.166 ccw(c36.659,33.529) 37.023,33.166 ; 37.023,33.167 37.26,33.403 cw(c37.406,33.257) 37.551,33.403 38.15,32.805 38.212,32.742 cw(c37.324,31.854) 38.58,31.854 38.58,28.735 ccw(c39.752,28.735) 38.923,27.906 39.062,27.767 ccw(c39.642,28.347) 39.642,27.527 42.316,27.527 ccw(c42.316,28.774) 43.124,27.824 ccw(c42.316,28.774) 43.198,27.892 ccw(c42.98,28.11) 43.288,28.11 43.288,28.477 cw(c43.446,28.477) 43.334,28.589 43.345,28.6 cw(c43.457,28.488) 43.396,28.634 XS3.9@44.187,28.961
P2D_P: DD1.127 XS3.8 | length 31.2
  Bottom Layer w0.158: DD1.127@33.08,43.01 33.08,41.996 cw(c32.923,41.996) 33.034,41.885 33.034,39.408 ccw(c35.574,39.408) 33.778,37.612 34.04,37.35 34.205,37.185 ccw(c34.351,37.33) 34.497,37.185 34.519,37.207 cw(c34.882,36.844) 35.194,37.252 35.201,37.252 35.246,37.207 ; 35.245,36.48 34.477,35.712 ccw(c34.623,35.566) 34.768,35.42 35.537,36.189 cw(c35.901,35.826) 36.264,36.189 cw(c35.901,35.826) 36.264,35.462 ; 35.246,36.48 ccw(c34.882,36.844) 35.291,37.156 35.291,37.162 35.246,37.207 ; 36.263,35.461 35.495,34.693 ccw(c35.641,34.548) 35.786,34.402 36.555,35.171 cw(c36.919,34.807) 37.231,35.216 37.237,35.216 37.282,35.171 ; 37.282,34.443 36.514,33.675 ccw(c36.659,33.529) 36.514,33.384 ccw(c36.659,33.529) 36.805,33.383 37.042,33.621 cw(c37.406,33.257) 37.769,33.621 38.368,33.022 38.43,32.96 cw(c37.324,31.854) 38.888,31.854 38.888,28.735 ccw(c39.752,28.735) 39.141,28.124 39.28,27.985 ccw(c39.642,28.347) 39.642,27.835 42.315,27.835 42.316,27.835 ccw(c42.316,28.774) 42.925,28.059 ccw(c42.822,28.179) 42.98,28.178 42.98,28.37 ccw(c42.822,28.37) 42.934,28.481 42.671,28.744 ccw(c42.15,28.224) XS3.8@42.15,28.96 ; 37.282,34.444 ccw(c36.919,34.807) 37.327,35.119 37.327,35.126 37.283,35.17
P2LED0: DD1.79 R27.1 XS3.13 | length 29.4
  Top Layer w0.2: R27.1@42.997,53.575 v1(43.875,53.575)
  Layer 2 w0.15: XS3.13@40.11,31.5 40.11,48.14 39.975,48.275 39.975,51.225 42.325,53.575 v1(43.875,53.575)
  Bottom Layer w0.15: v1(43.875,53.575) 43.875,53.572 45.787,51.66 46.83,51.66 DD1.79@46.88,51.61
P2LED1: DD1.80 R26.1 XS3.15 | length 30.4
  Top Layer w0.2: R26.1@42.997,52.475 43.202,52.68 43.232,52.68 43.435,52.882 v1(43.543,52.882)
  Layer 2 w0.15: v1(43.543,52.882) 41.575,50.914 41.575,45.525 42.2,44.9 42.2,39.11 XS3.15@49.81,31.5
  Bottom Layer w0.15: v1(43.543,52.882) 44.135,52.882 45.757,51.26 46.83,51.26 DD1.80@46.88,51.21
P2LED2: DD1.78 R28.1 R37.1 | length 25.3
  Top Layer w0.15: R37.1@52.5,35.097 52.5,42.2 52.3,42.4 52.3,45.851 53.6,47.151 53.6,52.366 v1(52.915,53.05)
  Bottom Layer w0.15: DD1.78@46.88,52.01 46.887,52.003 48.553,52.003 48.75,52.2 51.015,52.2 51.024,52.192 51.459,52.192 51.467,52.2 52.065,52.2 v1(52.915,53.05)
P3A_N: DD1.3 XS4.10 | length 32.8
  Bottom Layer w0.158: XS4.10@28.52,28.96 29.433,29.338 29.455,29.36 29.455,29.724 ccw(c29.394,29.724) 29.437,29.767 29.058,30.146 cw(c30.172,31.26) 28.597,31.26 28.597,31.918 cw(c29.222,31.918) 28.78,32.36 ccw(c27.894,33.246) 29.147,33.246 29.147,37.06 29.147,37.692 cw(c29.661,37.692) 29.661,38.206 29.99,38.206 ccw(c29.99,38.412) 29.99,38.618 29.153,38.618 cw(c29.153,39.132) 29.153,39.646 30.783,39.646 ccw(c30.783,39.852) 30.783,40.058 29.153,40.058 cw(c29.153,40.572) 29.153,41.086 30.783,41.086 ccw(c30.783,41.292) 30.783,41.498 29.153,41.498 cw(c29.153,42.012) 29.153,42.526 30.783,42.526 ccw(c30.783,42.732) 30.783,42.938 29.661,42.938 cw(c29.661,43.452) 29.147,43.452 29.147,43.685 29.147,44.96 cw(c29.566,44.96) 29.27,45.256 29.487,45.474 cw(c29.705,45.256) 29.705,45.564 29.755,45.564 cw(c29.866,45.453) 29.866,45.61 DD1.3@30.88,45.61
P3A_P: DD1.2 XS4.11 | length 32.4
  Bottom Layer w0.158: XS4.11@30.56,28.96 30.318,28.86 cw(c30.258,29.006) 30.198,28.86 30.1,28.9 cw(c30.161,29.046) 30.03,28.958 29.789,29.317 cw(c29.921,29.405) 29.763,29.405 29.763,29.724 ccw(c29.394,29.724) 29.655,29.985 29.627,30.013 29.276,30.364 cw(c30.172,31.26) 28.905,31.26 28.905,31.918 cw(c29.222,31.918) 28.998,32.142 ccw(c27.894,33.246) 29.455,33.246 29.455,37.06 29.455,37.692 cw(c29.661,37.692) 29.661,37.898 29.99,37.898 ccw(c29.99,38.412) 29.99,38.926 29.153,38.926 cw(c29.153,39.132) 29.153,39.338 30.783,39.338 ccw(c30.783,39.852) 30.783,40.366 29.153,40.366 cw(c29.153,40.572) 29.153,40.778 30.783,40.778 ccw(c30.783,41.292) 30.783,41.806 29.153,41.806 cw(c29.153,42.012) 29.153,42.218 30.783,42.218 ccw(c30.783,42.732) 30.783,43.246 29.661,43.246 cw(c29.661,43.452) 29.455,43.452 29.455,43.685 29.455,44.96 cw(c29.566,44.96) 29.487,45.038 29.705,45.256 29.755,45.256 ccw(c29.866,45.367) 29.866,45.21 DD1.2@30.88,45.21
P3B_N: DD1.5 XS4.5 | length 31.5
  Bottom Layer w0.158: XS4.5@29.54,26.42 cw(c29.54,27.072) 29.079,26.611 28.705,26.985 28.705,27.008 cw(c29.132,27.008) 28.83,27.31 cw(c29.112,27.028) 29.112,27.427 33.033,27.427 ccw(c33.033,28.332) 33.673,27.692 34.018,28.037 ccw(c33.245,28.81) 34.338,28.81 34.338,31.171 ccw(c32.091,31.171) 33.68,32.76 32.824,33.616 cw(c34.62,35.412) 32.08,35.412 32.08,36.022 cw(c32.286,36.022) 32.286,36.228 32.839,36.228 ccw(c32.839,36.742) 32.839,37.256 31.134,37.256 cw(c31.134,37.462) 31.134,37.668 31.566,37.668 ccw(c31.566,38.182) 32.08,38.182 32.08,39.135 32.08,43.91 cw(c32.283,43.91) 32.139,44.053 32.327,44.241 ccw(c31.575,44.992) 32.638,44.992 32.638,45.685 ccw(c32.098,45.685) 32.48,46.067 32.273,46.274 ccw(c32.055,46.056) 32.055,46.364 32.005,46.364 ccw(c31.894,46.253) 31.894,46.41 DD1.5@30.88,46.41
P3B_P: DD1.4 XS4.4 | length 31.1
  Bottom Layer w0.158: XS4.4@27.5,26.42 ccw(c27.5,27.222) 28.067,26.655 28.397,26.985 28.397,27.008 cw(c29.132,27.008) 28.612,27.528 cw(c29.112,27.028) 29.112,27.735 33.033,27.735 ccw(c33.033,28.332) 33.455,27.91 33.8,28.255 ccw(c33.245,28.81) 34.03,28.81 34.03,31.171 ccw(c32.091,31.171) 33.462,32.542 32.606,33.398 cw(c34.62,35.412) 31.772,35.412 31.772,36.022 cw(c32.286,36.022) 32.286,36.536 32.839,36.536 ccw(c32.839,36.742) 32.839,36.948 31.134,36.948 cw(c31.134,37.462) 31.134,37.976 31.566,37.976 ccw(c31.566,38.182) 31.772,38.182 31.772,39.135 31.772,43.91 cw(c32.283,43.91) 31.922,44.271 32.109,44.458 ccw(c31.575,44.992) 32.33,44.992 32.33,45.685 ccw(c32.098,45.685) 32.262,45.849 32.055,46.056 32.005,46.056 cw(c31.894,46.167) 31.894,46.01 DD1.4@30.88,46.01
P3C_N: DD1.8 XS4.2 | length 31.8
  Bottom Layer w0.158: XS4.2@24.062,26.693 24.167,26.751 ccw(c24.091,26.889) 24.203,26.778 24.207,26.782 ccw(c24.095,26.893) 24.243,26.839 24.355,27.144 cw(c24.999,26.909) 24.407,27.256 24.442,27.314 cw(c24.578,27.234) 24.466,27.346 25.872,28.752 ccw(c25.389,29.235) 26.072,29.235 26.072,34.709 26.072,36.617 cw(c26.586,36.617) 26.586,37.131 26.646,37.131 ccw(c26.646,37.337) 26.646,37.543 26.045,37.543 cw(c26.045,38.057) 26.045,38.571 26.646,38.571 ccw(c26.646,38.777) 26.646,38.983 26.045,38.983 cw(c26.045,39.497) 26.045,40.011 26.646,40.011 ccw(c26.646,40.217) 26.646,40.423 26.045,40.423 cw(c26.045,40.937) 26.045,41.451 26.646,41.451 ccw(c26.646,41.657) 26.646,41.863 26.586,41.863 cw(c26.586,42.377) 26.072,42.377 26.072,42.61 26.072,43.933 cw(c28.92,43.933) 26.906,45.947 28.012,47.053 cw(c29.246,45.819) 29.246,47.564 29.755,47.564 cw(c29.866,47.453) 29.866,47.61 DD1.8@30.88,47.61
P3C_P: DD1.7 XS4.3 | length 32.2
  Bottom Layer w0.158: XS4.3@25.46,26.42 25.276,26.334 25.025,26.425 24.971,26.458 24.709,26.705 cw(c24.902,26.909) 24.621,26.909 cw(c24.999,26.909) 24.732,27.176 26.09,28.534 ccw(c25.389,29.235) 26.38,29.235 26.38,34.709 26.38,36.617 cw(c26.586,36.617) 26.586,36.823 26.646,36.823 ccw(c26.646,37.337) 26.646,37.851 26.045,37.851 cw(c26.045,38.057) 26.045,38.263 26.646,38.263 ccw(c26.646,38.777) 26.646,39.291 26.045,39.291 cw(c26.045,39.497) 26.045,39.703 26.646,39.703 ccw(c26.646,40.217) 26.646,40.731 26.045,40.731 cw(c26.045,40.937) 26.045,41.143 26.646,41.143 ccw(c26.646,41.657) 26.646,42.171 26.586,42.171 cw(c26.586,42.377) 26.38,42.377 26.38,42.61 26.38,43.933 cw(c28.92,43.933) 27.124,45.729 28.23,46.835 cw(c29.246,45.819) 29.246,47.256 29.755,47.256 ccw(c29.866,47.367) 29.866,47.21 DD1.7@30.88,47.21
P3D_N: DD1.10 XS4.9 | length 33.5
  Bottom Layer w0.158: XS4.9@24.44,28.96 ccw(c24.44,28.05) 23.796,28.693 23.563,28.46 23.563,28.387 cw(c22.828,28.387) 23.348,27.867 cw(c22.647,28.568) 22.647,27.577 19.707,27.577 cw(c19.707,28.312) 19.187,27.792 cw(c20.552,29.157) 18.622,29.157 18.622,38.208 cw(c21.47,38.208) 19.456,40.222 26.81,47.576 cw(c28.824,45.562) 28.824,48.41 DD1.10@30.88,48.41
P3D_P: DD1.9 XS4.8 | length 33.4
  Bottom Layer w0.158: XS4.8@22.4,28.96 cw(c22.4,28.103) 23.006,28.709 23.255,28.46 23.255,28.387 cw(c22.828,28.387) 23.13,28.085 cw(c22.647,28.568) 22.647,27.885 19.707,27.885 cw(c19.707,28.312) 19.405,28.01 cw(c20.552,29.157) 18.93,29.157 18.93,38.208 cw(c21.47,38.208) 19.674,40.004 19.866,40.196 20.213,40.543 cw(c20.359,40.398) 20.505,40.543 20.512,40.537 ccw(c20.657,40.682) 20.803,40.537 ccw(c20.657,40.682) 20.803,40.828 20.796,40.835 cw(c20.942,40.98) 20.796,41.126 cw(c20.942,40.98) 21.087,41.126 21.094,41.119 ccw(c21.24,41.265) 21.386,41.119 ccw(c21.24,41.265) 21.386,41.41 21.379,41.417 cw(c21.524,41.563) 21.379,41.709 cw(c21.524,41.563) 21.67,41.709 21.677,41.702 ccw(c21.823,41.847) 21.968,41.702 ccw(c21.823,41.847) 21.968,41.993 21.961,42 cw(c22.107,42.146) 21.961,42.291 22.234,42.564 26.936,47.266 cw(c28.732,45.47) 28.732,48.01 DD1.9@30.88,48.01
P3LED0: DD1.77 R29.2 R42.1 | length 48.2
  Top Layer w0.15: R42.1@23,35.097 23,35.109 23.23,35.339 23.242,35.339 26.845,38.942 48.117,38.942 51.7,42.524 51.7,46.1 52.875,47.275 52.875,49.55 v1(52.3,50.125)
  Layer 2 w0.15: v1(51.241,52.717) 51.241,51.184 v1(52.3,50.125)
  Bottom Layer w0.15: DD1.77@46.88,52.41 46.89,52.4 48.375,52.4 48.67,52.695 49.325,52.695 ; R29.2@49.328,53.225 49.328,52.698 49.325,52.695 ; v1(51.241,52.717) 51.219,52.695 49.325,52.695
P3LED1: DD1.75 R32.1 XS4.15 | length 37.1
  Layer 2 w0.15: XS4.15@30.06,31.5 38.05,39.49 38.05,51.3 38.975,52.225 39.097,52.225 39.405,52.533 39.405,52.655 41.284,54.534 v1(42.149,54.534)
  Bottom Layer w0.15: v1(42.149,54.534) 44.266,54.534 45.59,53.21 DD1.75@46.88,53.21 48.035,53.21 48.48,53.655 48.48,53.968 48.925,54.413 49.266,54.413 R32.1@49.328,54.475
P3LED2: DD1.76 R30.1 R38.1 | length 40.9
  Top Layer w0.15: R38.1@32.5,35.097 32.5,35.109 32.73,35.339 32.742,35.339 36.028,38.625 48.225,38.625 52,42.4 52,45.976 53.25,47.226 53.25,50.6 v1(52.875,50.975)
  Layer 2 w0.15: v1(52.05,53.075) 52.875,52.25 v1(52.875,50.975)
  Bottom Layer w0.15: DD1.76@46.88,52.81 46.926,52.856 48.105,52.856 48.78,53.531 48.78,53.755 48.95,53.925 50.933,53.925 51.033,54.025 51.467,54.025 51.567,53.925 R30.1@52.053,53.925 52.05,53.922 v1(52.05,53.075)
pads on no net: DD1.15 DD1.16 DD1.19 DD1.22 DD1.24 DD1.25 DD1.26 DD1.27 DD1.29 DD1.30 DD1.31 DD1.32 DD1.35 DD1.37 DD1.38 DD1.41 DD1.42 DD1.43 DD1.44 DD1.45 DD1.57 DD1.58 DD1.59 DD1.60 DD1.61 DD1.74 DD1.87 DD1.92 DD1.93 DD1.94 DD1.95 DD1.117 L1.2 L1.4 XP1.0 XS1.17 XS1.18 XS2.17 XS2.18 XS3.17 XS3.18 XS4.17 XS4.18

## Polygon pours and split planes (outlines as drawn)
GND on Bottom Layer "GND" (solid, remove dead copper, pour order 18): 0,0 0,66.5 80,66.5 80,0
GND_ETH on Bottom Layer "GND_ETH_L04_P016" (solid, remove dead copper, pour order 16): 16.5,0.5 16.5,32.5 17.25,33.25 54,33.25 54,66.25 73,66.25 73.75,65.5 73.75,34.75 75.75,32.75 75.75,30.75 75.75,0.5
+1.1 on Bottom Layer "+1.1_L04_P012" (solid, pour order 12): 15.4,43.6 16.4,44.6 19.4,44.6 19.4,41.6 16.4,41.6 15.4,42.6
+3.3 on Bottom Layer "+3.3_L04_P011" (solid, pour order 11): 17,58.5 18,59.5 21,59.5 21,56.5 18,56.5 17,57.5
NetC41_2 on Bottom Layer "NETC41_2_L04_P010" (solid, pour order 10): 15.35,61.975 15.35,60.75 16.6,59.5 16.6,58.575 16.2,57.95 17.078,56.578 17.9,54.594 17.9,53 17.575,52.675 15.572,52.675 14.723,53.027 11.6,56.15 11.6,59.8 11.625,59.825 11.625,62.525 14.8,62.525
NetC40_2 on Bottom Layer "NETC40_2_L04_P009" (solid, pour order 9): 8.45,53.675 9.025,53.675 9.85,54.8 10.15,54.8 11.2,54.8 11.575,54.425 11.575,53.075 11.575,51.441 11.017,50.093 10.473,49.55 9.7,49.55 9.475,49.775 9.475,52.525 9.025,52.975 8.45,52.975
NetC42_2 on Bottom Layer "NETC42_2_L04_P008" (solid, pour order 8): 14.575,41.375 15.025,41.825 15.025,42.5 14.575,42.5 14.575,43.7 15.025,43.75 15.25,44.075 15.25,45.1 15.028,45.322 14.779,45.425 14.625,45.425 12.075,45.425 10.575,46.925 10.325,46.925 9.55,46.15 9.55,40.475 9.775,40.25 12.575,40.25
+12 on Bottom Layer "+12_L04_P006" (solid, pour order 6): 5.375,28.7 0.375,28.7 0.175,28.9 0.175,57.9 0.3,58.025 3.95,58.025 4.577,57.398 5.001,56.374 6.343,55.354 6.593,54.989 6.75,54.655 6.75,54.075 6.75,53.01 5.49,53.01 4.575,53.925 2.5,53.925 2.025,53.45 2.025,43.3 4.891,40.434 5.225,39.628 5.225,39.3 5.45,38.775 6.375,37.438 7.525,35.913 7.525,34.727 6.878,34.235 6.275,34.275 5.475,35.075 3.575,35.075 3.075,34.575 3.075,31.85 3.325,31.6 4.9,31.6 5.75,30.75 5.75,29.111 5.725,29.05
NetC36_1 on Bottom Layer "NETC36_1_L04_P000" (solid, pour order 0): 11.225,8.325 10.5,7.6 7.93,7.6 5.53,10 3.985,10.64 3.885,10.74 3.825,10.885 3.825,21.725 6.9,24.8 6.9,29.05 6.956,29.106 7.05,29.125 7.553,29.125 8.3,29.125 8.343,29.107 9.375,28.075 9.375,23.625 7.05,21.3 7.05,12.65 9.1,10.6 10.275,10.6 11.225,9.65
NetC39_2 on Bottom Layer "NETC39_2_L04_P007" (solid, pour order 7): 9.25,34.225 9.777,34.225 10.965,33.036 10.965,31.735 11.475,31.225 12.675,31.225 13.775,32.325 13.775,35.629 13.637,35.963 13.45,36.15 11.7,36.15 10.8,35.25 10.325,35.25 10,34.925 9.2,34.925
GND on Top Layer "GND_top" (solid, remove dead copper, pour order 17): 0,0 0,66.5 80,66.5 80,0
+3.3 on Top Layer "+3.3_L01_P015" (solid, remove dead copper, pour order 15): 18,56.5 18,59.5 21,59.5 27,65.5 39,65.5 41,63.5 41,59.075 39.75,57.825 39.75,55.375 41.125,54 42.127,54 42.127,52.173 42.549,52.201 42.525,50.775 43.5,49.8 43.5,48.875 42.975,48.875 42.75,48.65 42.75,48 42.25,47.5 41.275,47.5 41,47.225 41,45.825 41.588,45.237 41.737,45.087 41.737,44.887 41.125,44.275 40.525,44.275 40.375,44.425 40.375,47.125 40,47.5 35.5,47.5 35.5,54.25 35.75,54.5 36.7,54.5 37.25,55.05 37.25,57.474 38,58.224 38,62.5 37,63.5 28.25,63.5 21.25,56.5 21,56.5
+1.1 on Top Layer "+1.1_L01_P013" (solid, pour order 13): 24,47.5 24,48.75 27.25,52 28.05,52 29.925,53.875 29.925,54.61 32.15,57.5 33.1,57.5 33.1,56.825 32.4,55.675 32.248,55.443 32,54.61 32,52.95 32.25,52.95 32.25,52.4 32,52.4 32,49.312 28.687,49.312 27.625,48.25 27.625,45.375 29.75,43.25 33,43.25 33.5,43.75 45.25,43.75 47.25,43.75 48,44.5 48,55.5 46.3,57.2 43.7,57.2 43.375,57.525 43.375,57.825 43.8,58.25 48.15,58.25 50.65,55.75 50.65,43.525 48.725,41.6 34.1,41.6 33.35,40.85 27.9,40.85 27.15,41.6 26.6,41.6 16.4,41.6 16.4,44.65 21.15,44.65
GND on Layer 2 "GND_L02_P019" (solid, remove dead copper, pour order 19): 0,0 0,66.5 80,66.5 80,0
GND on Layer 1 "GND_L03_P020" (solid, remove dead copper, pour order 20): 0,0 0,66.5 80,66.5 80,0

## Keep-outs
Keep-Out Layer:
  circle w0.2: c19,63.5 r2.4
  circle w0.2: c77,63.5 r2.4
  circle w0.2: c77,14.5 r2.4

## Silkscreen, mask and mechanical layers (free items; w line width, h text height)
Top Overlay:
  drawing of 9 lines, arcs and shapes, not listed
  text "2025" at 16.175,54.775 h0.8
  text "и кому это нужно" at 42.041,17.713 h5
  text "Я не знаю," at 9.32,17.444 h5
Board Layer Stack Bottom Overlay:
  lines w0.15: 20.75,61.25 33.25,61.25 34.5,61.25 ; 24.75,63.75 36.75,63.75 ; 34.25,61 34.5,61.25 ; 36.5,63.5 36.75,63.75 ; 34.5,61.25 34.25,61.5 34.5,61.25 ; 36.75,63.75 36.5,64 36.75,63.75
Mechanical 4:
  the board outline again, w0.254
Drill Drawing:
  circle w0.254: c89.931,53.04 r0.847
  lines w0.254: 89.084,33.143 90.778,33.143 90.778,34.837 89.084,34.837 89.084,33.143 ; 89.084,37.377 89.508,37.377 89.931,36.953 90.354,37.377 90.778,37.377 90.354,37.8 90.778,38.223 90.354,38.223 89.931,38.647 89.508,38.223 89.084,38.223 89.508,37.8 89.084,37.377 ; 89.084,41.61 89.931,40.763 90.778,41.61 89.931,42.457 89.084,41.61 ; 89.084,46.267 90.778,46.267 89.931,44.573 89.084,46.267 ; 89.084,48.383 90.778,48.383 90.778,50.077 89.084,50.077 89.084,48.383 ; 89.084,56.003 89.931,56.427 90.778,56.003 90.354,56.85 90.778,57.697 89.931,57.273 89.084,57.697 89.508,56.85 89.084,56.003 ; 89.084,60.237 89.508,60.237 89.508,59.813 90.354,59.813 90.354,60.237 90.778,60.237 90.778,61.083 90.354,61.083 90.354,61.507 89.508,61.507 89.508,61.083 89.084,61.083 89.084,60.237 ; 89.423,33.482 90.439,33.482 90.439,34.498 89.423,34.498 89.423,33.482
  lines w0.381: 87.565,32 359.625,32 ; 87.565,62.48 359.625,62.48 ; 101.558,28.19 101.558,66.29 ; 116.794,28.19 116.794,66.29 ; 146.503,28.19 146.503,66.29 ; 159.352,28.19 159.352,66.29 ; 177.991,28.19 177.991,66.29 ; 216.079,28.19 216.079,66.29 ; 231.062,28.19 231.062,66.29 ; 250.005,28.19 250.005,66.29 ; 269.05,28.19 269.05,66.29 ; 290.735,28.19 290.735,66.29 ; 324.609,28.19 324.609,66.29 ; 87.565,28.19 359.625,28.19 359.625,66.29 87.565,66.29 87.565,28.19
  text "Symbol" at 89.851,63.623 h1.83
  text "Count" at 102.701,63.623 h1.83
  text "Hole Size" at 117.937,63.623 h1.83
  text "Plated" at 147.646,63.623 h1.83
  text "Hole Type" at 160.495,63.623 h1.83
  text "Drill Layer Pair" at 179.134,63.623 h1.83
  text "Via/Pad" at 217.222,63.623 h1.83
  text "Pad Shape" at 232.205,63.623 h1.83
  text "Template" at 251.148,63.623 h1.83
  text "Description" at 270.193,63.623 h1.83
  text "Hole Tolerance (+)" at 291.878,63.623 h1.83
  text "Hole Tolerance (-)" at 325.752,63.623 h1.83
  text "2" at 102.701,59.813 h1.52
  text "1,000mm (39,37mil)" at 117.937,59.813 h1.52
  text "PTH" at 147.646,59.813 h1.52
  text "Round" at 160.495,59.813 h1.52
  text "Top Layer - Bottom Layer" at 179.134,59.813 h1.52
  text "Pad" at 217.222,59.813 h1.52
  text "(Mixed)" at 232.205,59.813 h1.52
  text "(Mixed)" at 251.148,59.813 h1.52
  text "4" at 102.701,56.003 h1.52
  text "3,000mm (118,11mil)" at 117.937,56.003 h1.52
  text "NPTH" at 147.646,56.003 h1.52
  text "Round" at 160.495,56.003 h1.52
  text "Top Layer - Bottom Layer" at 179.134,56.003 h1.52
  text "Pad" at 217.222,56.003 h1.52
  text "Rounded" at 232.205,56.003 h1.52
  text "(Mixed)" at 251.148,56.003 h1.52
  text "8" at 102.701,52.193 h1.52
  text "1,570mm (61,81mil)" at 117.937,52.193 h1.52
  text "PTH" at 147.646,52.193 h1.52
  text "Round" at 160.495,52.193 h1.52
  text "Top Layer - Bottom Layer" at 179.134,52.193 h1.52
  text "Pad" at 217.222,52.193 h1.52
  text "Rounded" at 232.205,52.193 h1.52
  text "c236h157" at 251.148,52.193 h1.52
  text "8" at 102.701,48.383 h1.52
  text "3,200mm (125,98mil)" at 117.937,48.383 h1.52
  text "NPTH" at 147.646,48.383 h1.52
  text "Round" at 160.495,48.383 h1.52
  text "Top Layer - Bottom Layer" at 179.134,48.383 h1.52
  text "Pad" at 217.222,48.383 h1.52
  text "Rounded" at 232.205,48.383 h1.52
  text "c0hn320m340" at 251.148,48.383 h1.52
  text "16" at 102.701,44.573 h1.52
  text "1,030mm (40,55mil)" at 117.937,44.573 h1.52
  text "PTH" at 147.646,44.573 h1.52
  text "Round" at 160.495,44.573 h1.52
  text "Top Layer - Bottom Layer" at 179.134,44.573 h1.52
  text "Pad" at 217.222,44.573 h1.52
  text "Rounded" at 232.205,44.573 h1.52
  text "c154h103" at 251.148,44.573 h1.52
  text "18" at 102.701,40.763 h1.52
  text "0,400mm (15,75mil)" at 117.937,40.763 h1.52
  text "PTH" at 147.646,40.763 h1.52
  text "Round" at 160.495,40.763 h1.52
  text "Top Layer - Bottom Layer" at 179.134,40.763 h1.52
  text "Via" at 217.222,40.763 h1.52
  text "Rounded" at 232.205,40.763 h1.52
  text "v80h40" at 251.148,40.763 h1.52
  text "48" at 102.701,36.953 h1.52
  text "0,890mm (35,04mil)" at 117.937,36.953 h1.52
  text "PTH" at 147.646,36.953 h1.52
  text "Round" at 160.495,36.953 h1.52
  text "Top Layer - Bottom Layer" at 179.134,36.953 h1.52
  text "Pad" at 217.222,36.953 h1.52
  text "Rounded" at 232.205,36.953 h1.52
  text "c145h89" at 251.148,36.953 h1.52
  text "450" at 102.701,33.143 h1.52
  text "0,300mm (11,81mil)" at 117.937,33.143 h1.52
  text "PTH" at 147.646,33.143 h1.52
  text "Round" at 160.495,33.143 h1.52
  text "Top Layer - Bottom Layer" at 179.134,33.143 h1.52
  text "Via" at 217.222,33.143 h1.52
  text "Rounded" at 232.205,33.143 h1.52
  text "(Mixed)" at 251.148,33.143 h1.52
  text "554 Total" at 102.701,29.333 h1.52